# Altium PCB encoder.PcbDoc
Units mm, origin at the board's own origin, x right, y up, seen from the top; angles counter-clockwise.
Board outline 45.6 x 15 mm, 2 copper layers (Top Layer, Bottom Layer); 2 components, 6 nets, 16 pads, 15 vias.
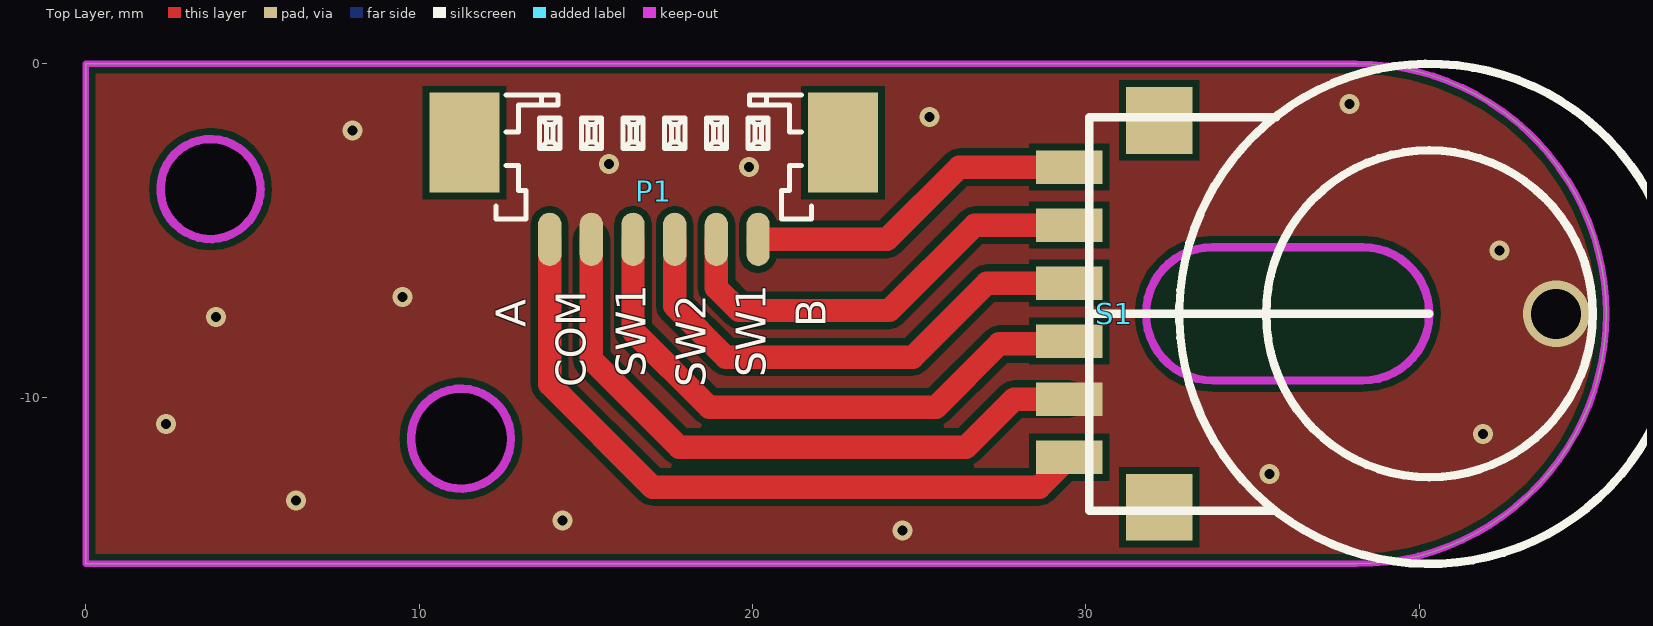
[diagram p0: Top Layer view]
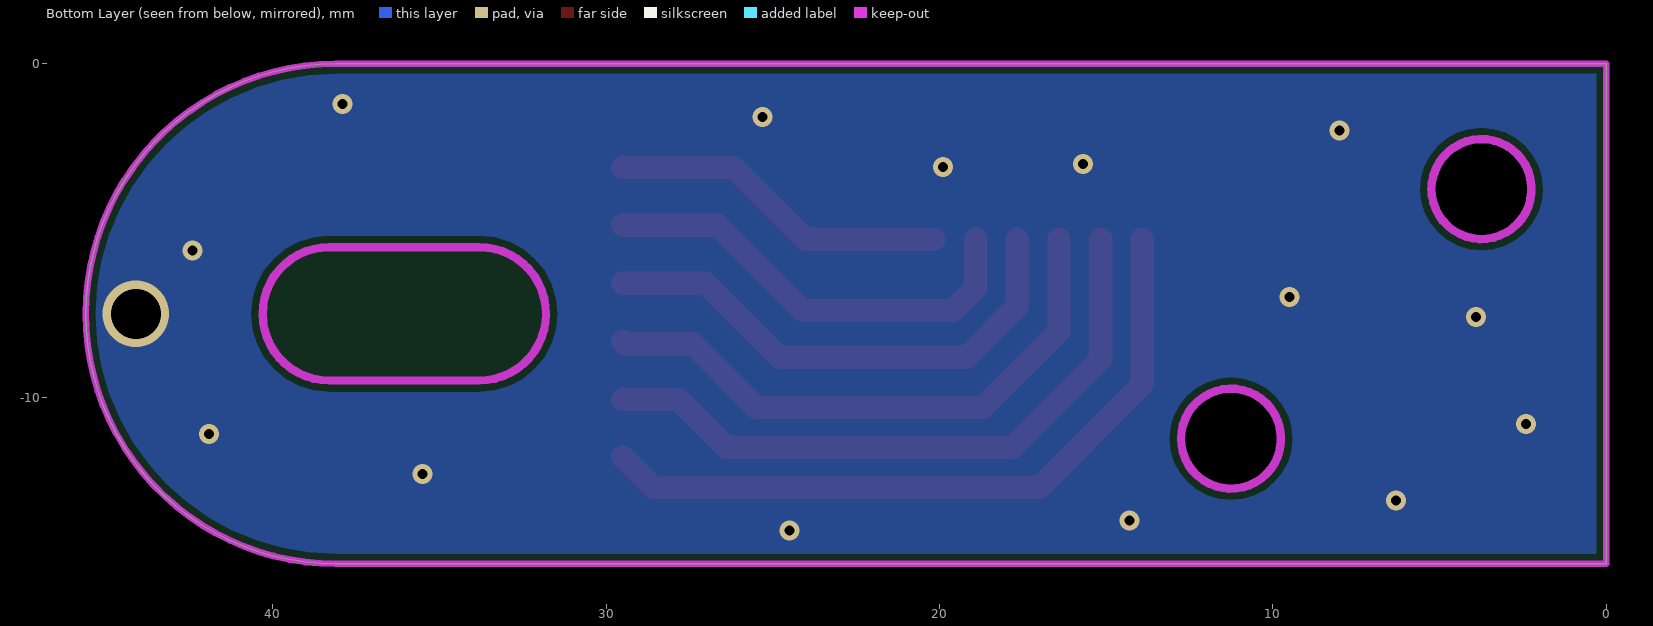
[diagram p1: Bottom Layer view, seen from below]

## Layer stack, top to bottom
Top Layer: signal copper 0.0356
Dielectric: dielectric 0.32, FR-4, Dk 4.8
Bottom Layer: signal copper 0.0356

## Board outline
0,-15 0,0 38.104,0 38.104,-0.001 cw(c38.104,-7.501) 38.1,-15.001 38.1,-15
cut-out: 9.754,-11.246 ccw(c11.254,-11.246) 11.254,-12.746 ccw(c11.254,-11.246) 12.754,-11.246 ccw(c11.254,-11.246) 11.254,-9.746 ccw(c11.254,-11.246)
cut-out: 2.242,-3.758 ccw(c3.742,-3.758) 3.742,-5.258 ccw(c3.742,-3.758) 5.242,-3.758 ccw(c3.742,-3.758) 3.742,-2.258 ccw(c3.742,-3.758)

## Design rules (kind name [scope] priority, off if disabled: settings)
Clearance [All] p1: gap=0.2
ComponentClearance [All] p1 off: gap=0.254 collisioncheckmode=3 verticalgap=0.254 showdistances=FALSE
PolygonConnect [All] p1: connectstyle=Direct reliefconductorwidth=0.254 reliefentries=4 polygonreliefangle="90 Angle"
RoutingVias [All] p1: holewidth=0.3 width=0.6 viastyle="Through Hole" minholewidth=0.3 minwidth=0.6 maxholewidth=0.3 maxwidth=0.6
SilkscreenOverComponentPads [All] p1: minsilkscreentomaskgap=0.254
SolderMaskExpansion [All] p1: expansion=0.102
Width [All] p1: maxlimit=3 minlimit=0.2 preferedwidth=0.2
26 further rules are at their usual default settings.

## Components (designator, comment, footprint, x,y, rotation, side; value= is the part's Value field where it differs from the comment)
P1 "Header 6" "MX1.25-6P 立" 12,-2.1 r0 top
S1 "滚轮编码器" 滚轮编码器 30.1,-7.5 r180 top

## Footprints (in the part's own frame and the unit in brackets; to place one, negate y for a bottom-side part, rotate by r counter-clockwise, add the part's x,y. Pads: shape width x height; smd on the part's side, far side on the other; paste and mask are expansions set on the pad)
"MX1.25-6P 立" [mm]
  rect 2.1x3 smd: 0(-0.635,-0.268) 0(10.715,-0.268)
  oval 0.7x1.6 smd: 1(1.915,-3.168) 2(3.165,-3.168) 3(4.415,-3.168) 4(5.665,-3.168) 5(6.915,-3.168) 6(8.165,-3.168)
  silkscreen extent 0.31,-2.56 9.77,1.16
滚轮编码器 [mm]
  rect 2x2 smd: 0(-2.1,5.8) 0(-2.1,-5.8)
  rect 2x1 smd: 1(0.6,4.3) 2(0.6,2.56) 3(0.6,0.82) 4(0.6,-0.92) 5(0.6,-2.66) 6(0.6,-4.4)
  Keep-Out Layer lines w0.254: -3.7,2 cw(c-3.7,0) -3.7,-2 -8.2,-2 cw(c-8.2,0) -8.2,2 -3.7,2
  silkscreen extent -17.7,-7.5 0,7.5

## Part data
P1: "Header, 6-Pin"

## Via types
v1: diameter 0.6, hole 0.3, Top Layer to Bottom Layer, tented both sides, 14 vias
v2: diameter 2, hole 1.5, Top Layer to Bottom Layer, tented both sides, 1 vias

## Nets (pads, with @x,y where several pads share a name; then routed paths per layer and width w, separated by ;. In a path a pad name is that pad's centre, name@x,y a point inside that pad or via, vN(x,y) a via of type N, cw(c..) or ccw(c..) an arc to the next point about the centre after c; other vN are vias at no path point)
GND: P1.2 S1.2 | length 19.6
  Top Layer w0.7: P1.2 15.165,-8.865 17.8,-11.5 26.4,-11.5 27.84,-10.06 S1.2
  other v1: 24.5,-14 14.3,-13.7 6.3,-13.1 35.5,-12.3 41.9,-11.1 2.4,-10.8 3.9,-7.6 9.5,-7 42.4,-5.6 19.9,-3.1 15.7,-3 8,-2 25.3,-1.6 37.9,-1.2
  other v2: 44.1,-7.5
NetP1_1: P1.1 S1.1 | length 21.6
  Top Layer w0.7: P1.1 13.915,-9.615 17,-12.7 28.6,-12.7 S1.1
NetP1_3: P1.3 S1.3 | length 17.6
  Top Layer w0.7: P1.3 16.415,-8.015 18.7,-10.3 25.5,-10.3 27.4,-8.4 29.42,-8.4 S1.3
NetP1_4: P1.4 S1.4 | length 15.4
  Top Layer w0.7: P1.4 17.665,-7.265 19.2,-8.8 24.8,-8.8 27.02,-6.58 S1.4
NetP1_5: P1.5 S1.5 | length 13.4
  Top Layer w0.7: P1.5 18.915,-6.715 19.6,-7.4 24.1,-7.4 26.66,-4.84 S1.5
NetP1_6: P1.6 S1.6 | length 10.2
  Top Layer w0.7: P1.6 24.032,-5.268 26.2,-3.1 S1.6
pads on no net: P1.0 S1.0

## Polygon pours and split planes (outlines as drawn)
GND on Top Layer "Top Layer-No Net" (solid, remove dead copper): -2.9,1.7 50.5,1.7 51.5,2.7 51.5,-19.2 -2.3,-19.2 -4.2,-21.1
GND on Bottom Layer "Top Layer-No Net" (solid, remove dead copper): -4.5,2.6 -3.2,3.9 58.5,3.9 58.5,-18.4 55,-21.9 54.1,-21 -3,-21

## Keep-outs
Keep-Out Layer:
  circle w0.254: c11.254,-11.246 r1.5
  circle w0.254: c3.742,-3.758 r1.5
  lines w0.2: 0,-15 38.1,-15 ccw(c38.104,-7.501) 38.104,-0.001 0,0 0,-15

## Silkscreen, mask and mechanical layers (free items; w line width, h text height)
Top Overlay:
  text "A" at 13.2,-7.901 h0.9 r90
  text "B" at 22.2,-7.901 h0.9 r90
  text "SW1" at 16.8,-9.4 h0.9 r90
  text "SW1" at 20.4,-9.4 h0.9 r90
  text "COM" at 15,-9.7 h0.9 r90
  text "SW2" at 18.6,-9.7 h0.9 r90